# EAGLE board untitled (EAGLE 6.4)
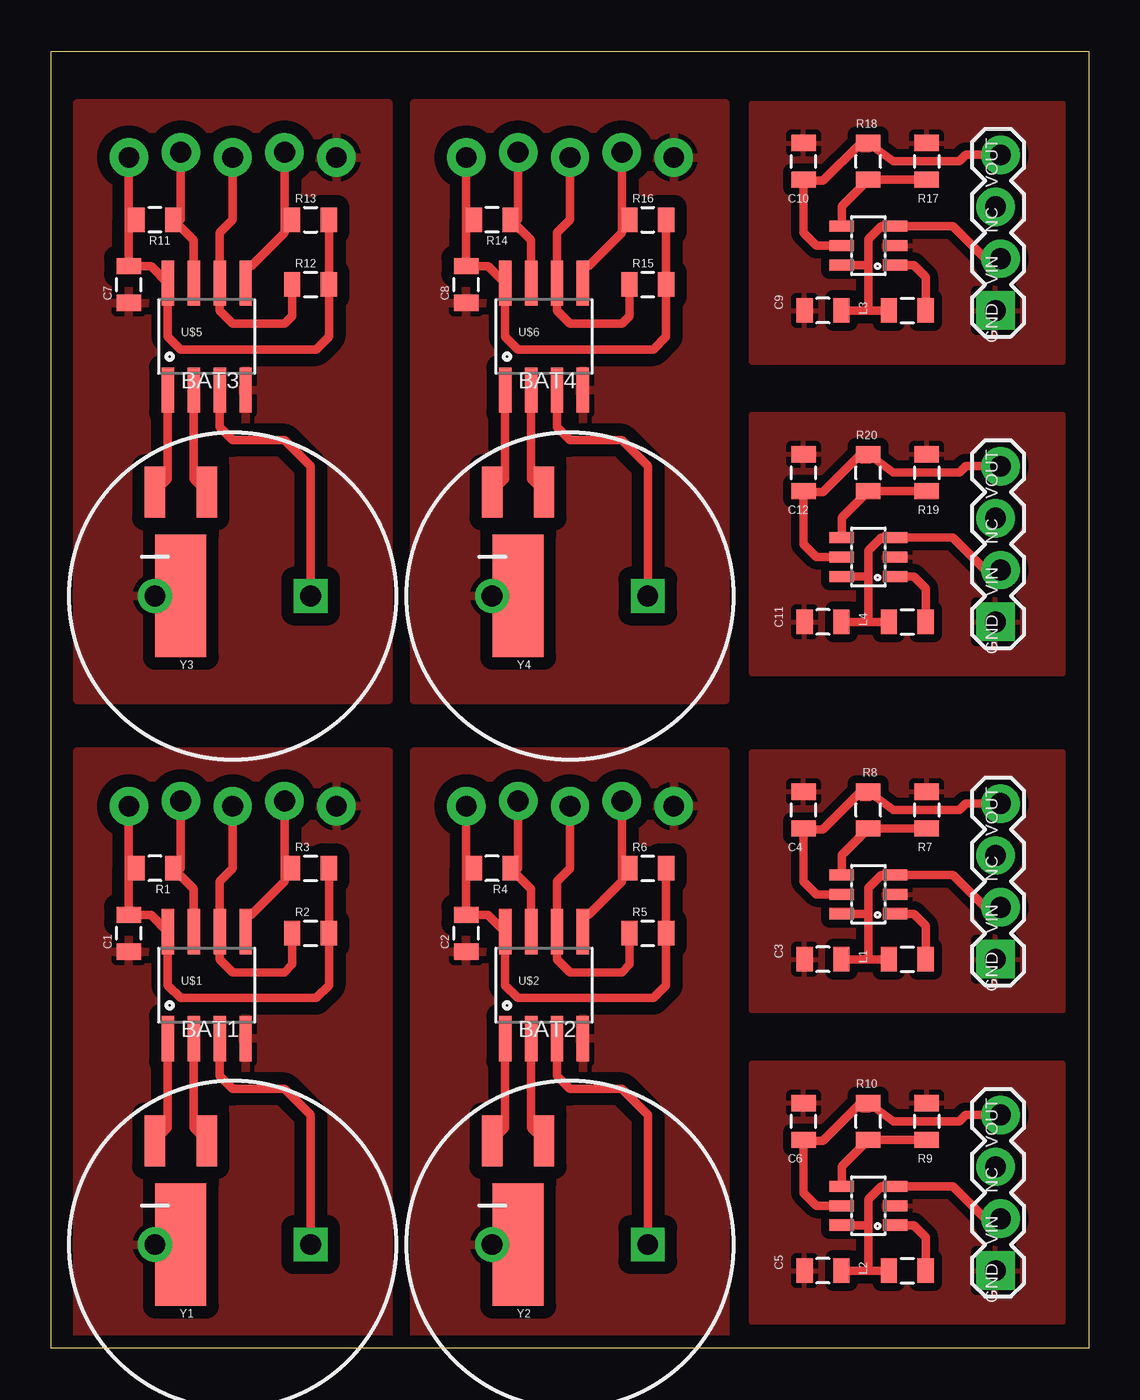
[diagram p0: board, top side]
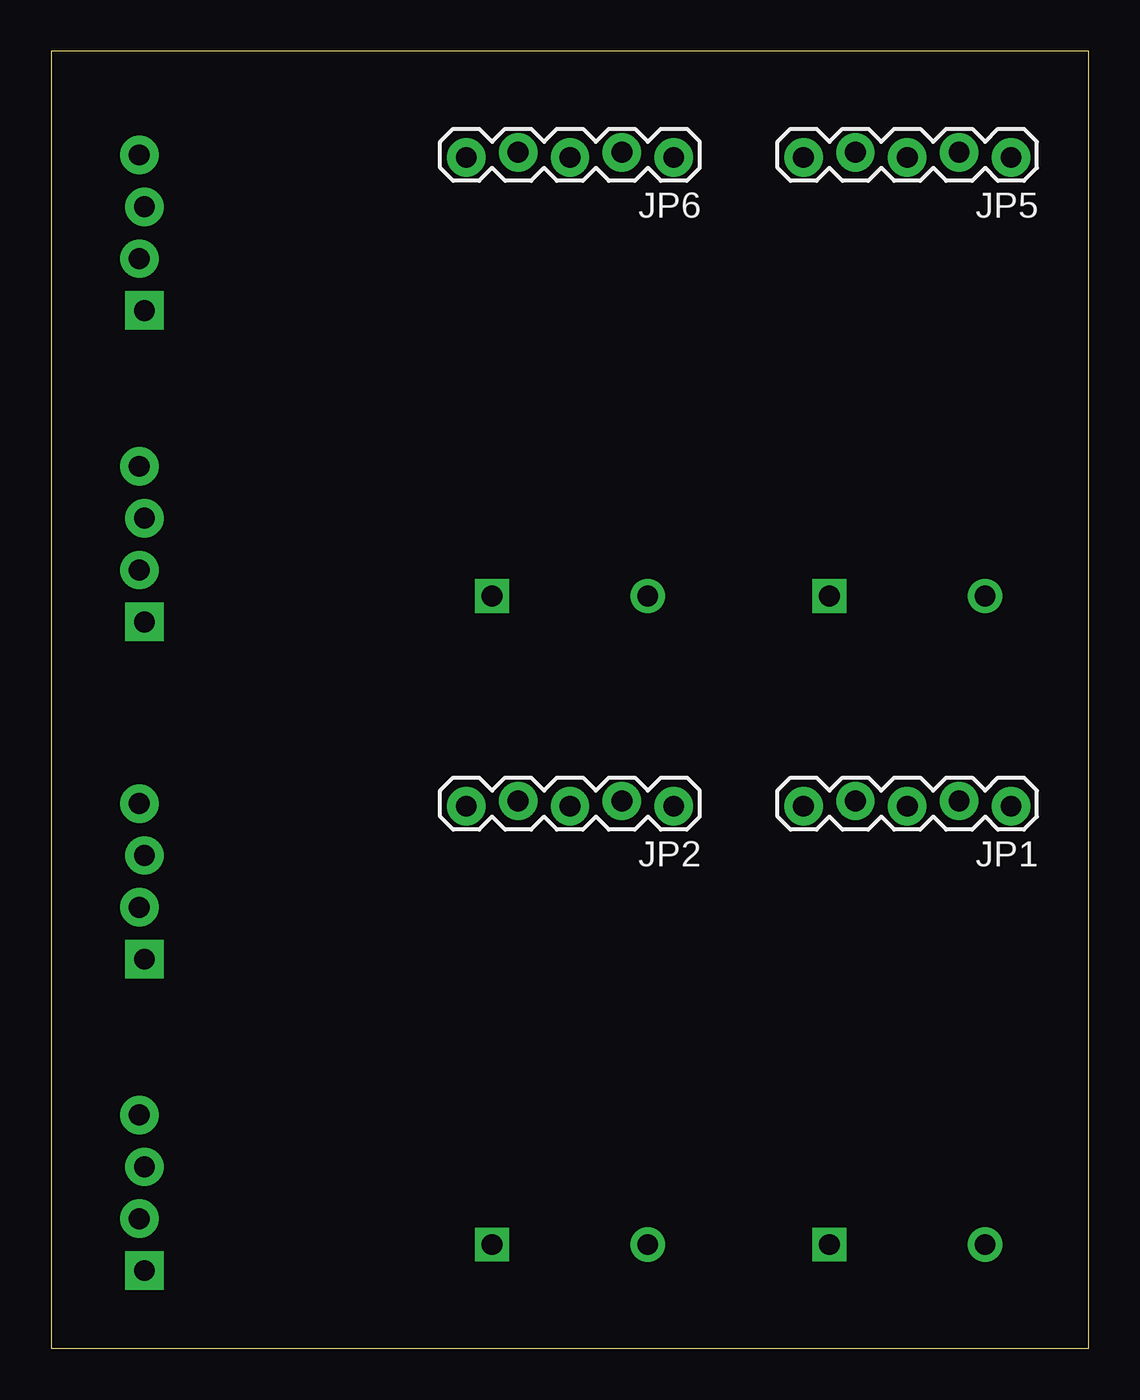
[diagram p1: board, bottom side, seen from below]

Size 50.8 x 63.5 mm. Coordinates in mm from the lower left corner, seen from the top.
Outline: 0,0 0,63.5 50.8,63.5 50.8,0 0,0
Copper layers (1*16): Top 0.035mm / dielectric 1.5mm / Bottom 0.035mm
Design rules "default *": minimum track width 10mil, minimum drill 24mil, track to track 8mil, track to pad 8mil, pad to pad 8mil, via to via 8mil, smd to smd 8mil, copper to edge 10mil, drill to drill 8mil, minimum pad ring 10mil, minimum via ring 8mil, stop-mask expansion 4mil, vias tented up to drill 0mil, thermal gap 10mil

## Footprints (pad centres in the part's own frame; a part is rotated, then mirrored left to right if it is on the bottom)
CPOL-RADIAL-1000UF-63V = drill 1.016 pad 1.651 square: 1 3.81,0 | drill 1.016 pad 1.676: 2 -3.81,0
0805 = smd 0.8 x 1.2: 1 -0.9,0; 2 0.9,0
1X05_LOCK = drill 1.016 pad 1.88: 1 0,0.127; 2 2.54,-0.127; 3 5.08,0.127; 4 7.62,-0.127; 5 10.16,0.127
1X04_LOCK = drill 1.016 pad 1.88 square: 1 0,0.127 | drill 1.016 pad 1.88: 2 2.54,-0.127; 3 5.08,0.127; 4 7.62,-0.127
SO08 = smd 0.61 x 2.21: 1 -1.905,-2.616; 2 -0.635,-2.616; 3 0.635,-2.616; 4 1.905,-2.616; 5 1.905,2.616; 6 0.635,2.616; 7 -0.635,2.616; 8 -1.905,2.616
SOT23-6L = smd 0.55 x 1.2: 1 -0.95,-1.3; 2 0,-1.3; 3 0.95,-1.3; 4 0.95,1.3; 5 0,1.3; 6 -0.95,1.3
CRYSTAL-32KHZ-SMD = smd 2.5 x 6: SHEILD 0,5.08 | smd 1 x 2.5: X1 -1.27,0; X2 1.27,0

## Placement (x,y rotation side)
BAT1  [CPOL-RADIAL-1000UF-63V]  8.89,5.08 0 top
BAT2  [CPOL-RADIAL-1000UF-63V]  25.4,5.08 0 top
BAT3  [CPOL-RADIAL-1000UF-63V]  8.89,36.83 0 top
BAT4  [CPOL-RADIAL-1000UF-63V]  25.4,36.83 0 top
C1  [0805]  3.81,20.32 90 top
C2  [0805]  20.32,20.32 90 top
C3  [0805]  37.78,19.05 180 top
C4  [0805]  36.83,26.35 90 top
C5  [0805]  37.78,3.81 180 top
C6  [0805]  36.83,11.11 90 top
C7  [0805]  3.81,52.07 90 top
C8  [0805]  20.32,52.07 90 top
C9  [0805]  37.78,50.8 180 top
C10  [0805]  36.83,58.1 90 top
C11  [0805]  37.78,35.56 180 top
C12  [0805]  36.83,42.86 90 top
JP1  [1X05_LOCK]  3.81,26.67 180 bottom
JP2  [1X05_LOCK]  20.32,26.67 180 bottom
JP3  [1X04_LOCK]  46.35,19.05 90 top
JP4  [1X04_LOCK]  46.35,3.81 90 top
JP5  [1X05_LOCK]  3.81,58.42 180 bottom
JP6  [1X05_LOCK]  20.32,58.42 180 bottom
JP7  [1X04_LOCK]  46.35,50.8 90 top
JP8  [1X04_LOCK]  46.35,35.56 90 top
L1  [0805]  41.91,19.05 0 top
L2  [0805]  41.91,3.81 0 top
L3  [0805]  41.91,50.8 0 top
L4  [0805]  41.91,35.56 0 top
R1  [0805]  5.08,23.5 180 top
R2  [0805]  12.7,20.32 0 top
R3  [0805]  12.7,23.5 0 top
R4  [0805]  21.59,23.5 180 top
R5  [0805]  29.21,20.32 0 top
R6  [0805]  29.21,23.5 0 top
R7  [0805]  42.86,26.35 270 top
R8  [0805]  40.01,26.35 90 top
R9  [0805]  42.86,11.11 270 top
R10  [0805]  40.01,11.11 90 top
R11  [0805]  5.08,55.24 180 top
R12  [0805]  12.7,52.07 0 top
R13  [0805]  12.7,55.24 0 top
R14  [0805]  21.59,55.24 180 top
R15  [0805]  29.21,52.07 0 top
R16  [0805]  29.21,55.24 0 top
R17  [0805]  42.86,58.1 270 top
R18  [0805]  40.01,58.1 90 top
R19  [0805]  42.86,42.86 270 top
R20  [0805]  40.01,42.86 90 top
U$1  BQ32000  [SO08]  7.62,17.78 0 top
U$2  BQ32000  [SO08]  24.13,17.78 0 top
U$3  TLV61220  [SOT23-6L]  40.01,22.23 90 top
U$4  TLV61220  [SOT23-6L]  40.01,6.99 90 top
U$5  BQ32000  [SO08]  7.62,49.53 0 top
U$6  BQ32000  [SO08]  24.13,49.53 0 top
U$7  TLV61220  [SOT23-6L]  40.01,53.98 90 top
U$8  TLV61220  [SOT23-6L]  40.01,38.73 90 top
Y1  [CRYSTAL-32KHZ-SMD]  6.35,10.16 180 top
Y2  [CRYSTAL-32KHZ-SMD]  22.86,10.16 180 top
Y3  [CRYSTAL-32KHZ-SMD]  6.35,41.91 180 top
Y4  [CRYSTAL-32KHZ-SMD]  22.86,41.91 180 top

## Library data of the parts
BAT1-BAT4 = SparkFun-Capacitors
C1-C12 L1-L4 R1-R20 = SparkFun-Passives
JP1-JP8 = SparkFun-Connectors
U$1-U$8 = custom
Y1-Y4 = SparkFun-FreqCtrl

## Nets
GND: BAT1.2 C1.1 JP1.5 U$1.4
GND1: BAT2.2 C2.1 JP2.5 U$2.4
GND2: C3.2 C4.2 JP3.1 R7.1 U$3.2
GND3: C5.2 C6.2 JP4.1 R9.1 U$4.2
GND4: BAT3.2 C7.1 JP5.5 U$5.4
GND5: BAT4.2 C8.1 JP6.5 U$6.4
GND6: C9.2 C10.2 JP7.1 R17.1 U$7.2
GND7: C11.2 C12.2 JP8.1 R19.1 U$8.2
N$1: BAT1.1 U$1.3
N$2: JP1.2 R1.1 U$1.7
N$3: JP1.3 R2.1 U$1.6
N$4: JP1.4 R3.1 U$1.5
N$5: U$1.1 Y1.X2
N$6: U$1.2 Y1.X1
N$7: JP2.2 R4.1 U$2.7
N$8: JP2.3 R5.1 U$2.6
N$9: JP2.4 R6.1 U$2.5
N$10: U$2.1 Y2.X2
N$11: U$2.2 Y2.X1
N$12: BAT2.1 U$2.3
N$13: L1.2 U$3.1
N$14: R7.2 R8.1 U$3.4
N$15: C4.1 JP3.4 R8.2 U$3.5
N$16: L2.2 U$4.1
N$17: R9.2 R10.1 U$4.4
N$18: C6.1 JP4.4 R10.2 U$4.5
N$19: JP5.2 R11.1 U$5.7
N$20: JP5.3 R12.1 U$5.6
N$21: JP5.4 R13.1 U$5.5
N$22: U$5.1 Y3.X2
N$23: U$5.2 Y3.X1
N$24: BAT3.1 U$5.3
N$25: JP6.2 R14.1 U$6.7
N$26: JP6.3 R15.1 U$6.6
N$27: JP6.4 R16.1 U$6.5
N$28: U$6.1 Y4.X2
N$29: U$6.2 Y4.X1
N$30: BAT4.1 U$6.3
N$31: L3.2 U$7.1
N$32: R17.2 R18.1 U$7.4
N$33: C10.1 JP7.4 R18.2 U$7.5
N$34: L4.2 U$8.1
N$35: R19.2 R20.1 U$8.4
N$36: C12.1 JP8.4 R20.2 U$8.5
VCC: C1.2 JP1.1 R1.2 R2.2 R3.2 U$1.8
VCC1: C2.2 JP2.1 R4.2 R5.2 R6.2 U$2.8
VCC2: C7.2 JP5.1 R11.2 R12.2 R13.2 U$5.8
VCC3: C8.2 JP6.1 R14.2 R15.2 R16.2 U$6.8
VIN: C3.1 JP3.2 L1.1 U$3.3 U$3.6
VIN1: C5.1 JP4.2 L2.1 U$4.3 U$4.6
VIN2: C9.1 JP7.2 L3.1 U$7.3 U$7.6
VIN3: C11.1 JP8.2 L4.1 U$8.3 U$8.6

## Tracks (layer width: path | path; a pad name or v marks a point on that pad's centre or on a via)
GND
  pour Top (isolate 0.61): 1.27,0 1.27,29.21 16.51,29.21 16.51,0
GND1
  pour Top (isolate 0.61): 17.78,0 17.78,29.21 33.02,29.21 33.02,0
GND2
  pour Top (isolate 0.406): 34.29,29.21 49.53,29.21 49.53,16.51 34.29,16.51
GND3
  pour Top (isolate 0.406): 34.29,13.97 49.53,13.97 49.53,1.27 34.29,1.27
GND4
  pour Top (isolate 0.61): 1.27,31.75 1.27,60.96 16.51,60.96 16.51,31.75
GND5
  pour Top (isolate 0.61): 17.78,31.75 17.78,60.96 33.02,60.96 33.02,31.75
GND6
  pour Top (isolate 0.406): 34.29,60.96 49.53,60.96 49.53,48.26 34.29,48.26
GND7
  pour Top (isolate 0.406): 34.29,45.72 49.53,45.72 49.53,33.02 34.29,33.02
N$1
  Top 0.406: U$1.3 8.26,13.34 8.89,12.7 11.43,12.7 12.7,11.43 BAT1.1
N$2
  Top 0.406: JP1.2 6.35,23.5 R1.1 6.99,22.49 U$1.7
N$3
  Top 0.406: R2.1 11.8,18.79 11.43,18.41 8.89,18.41 8.26,19.05 U$1.6 8.26,22.86 8.89,23.5 JP1.3
N$4
  Top 0.406: U$1.5 9.53,21.22 9.79,21.22 11.43,22.86 11.43,23.5 | JP1.4 11.43,23.5 | R3.1 11.43,23.5
N$5
  Top 0.406: Y1.X2 5.71,10.79 U$1.1
N$6
  Top 0.406: Y1.X1 6.99,10.79 U$1.2
N$7
  Top 0.406: JP2.2 22.86,23.5 R4.1 23.5,22.49 U$2.7
N$8
  Top 0.406: R5.1 28.31,18.79 27.94,18.41 25.4,18.41 24.77,19.05 U$2.6 24.77,22.86 25.4,23.5 JP2.3
N$9
  Top 0.406: U$2.5 26.04,21.22 26.3,21.22 27.94,22.86 27.94,23.5 | JP2.4 27.94,23.5 | R6.1 27.94,23.5
N$10
  Top 0.406: Y2.X2 22.23,10.79 U$2.1
N$11
  Top 0.406: Y2.X1 23.5,10.79 U$2.2
N$12
  Top 0.406: U$2.3 24.77,13.34 25.4,12.7 27.94,12.7 29.21,11.43 BAT2.1
N$13
  Top 0.406: U$3.1 42.23,21.27 42.81,20.69 L1.2
N$14
  Top 0.406: R7.2 R8.1 38.7,24.15 U$3.4
N$15
  Top 0.406: U$3.5 37.47,22.23 36.83,22.86 C4.1 36.88,25.4 37.78,25.4 39.63,27.25 R8.2 | 39.69,26.99 40.06,26.99 R8.2 | R8.2 41.22,26.35 44.45,26.35 44.77,26.67 JP3.4
N$16
  Top 0.406: U$4.1 42.23,6.04 42.81,5.45 L2.2
N$17
  Top 0.406: R9.2 R10.1 38.7,8.91 U$4.4
N$18
  Top 0.406: U$4.5 37.47,6.99 36.83,7.62 C6.1 36.88,10.16 37.78,10.16 39.63,12.01 R10.2 | 39.69,11.75 40.06,11.75 R10.2 | R10.2 41.22,11.11 44.45,11.11 44.77,11.43 JP4.4
N$19
  Top 0.406: JP5.2 6.35,55.24 R11.1 6.99,54.24 U$5.7
N$20
  Top 0.406: R12.1 11.8,50.53 11.43,50.16 8.89,50.16 8.26,50.8 U$5.6 8.26,54.61 8.89,55.24 JP5.3
N$21
  Top 0.406: U$5.5 9.53,52.97 9.79,52.97 11.43,54.61 11.43,55.24 | JP5.4 11.43,55.24 | R13.1 11.43,55.24
N$22
  Top 0.406: Y3.X2 5.71,42.55 U$5.1
N$23
  Top 0.406: Y3.X1 6.99,42.55 U$5.2
N$24
  Top 0.406: U$5.3 8.26,45.09 8.89,44.45 11.43,44.45 12.7,43.18 BAT3.1
N$25
  Top 0.406: JP6.2 22.86,55.24 R14.1 23.5,54.24 U$6.7
N$26
  Top 0.406: R15.1 28.31,50.53 27.94,50.16 25.4,50.16 24.77,50.8 U$6.6 24.77,54.61 25.4,55.24 JP6.3
N$27
  Top 0.406: U$6.5 26.04,52.97 26.3,52.97 27.94,54.61 27.94,55.24 | JP6.4 27.94,55.24 | R16.1 27.94,55.24
N$28
  Top 0.406: Y4.X2 22.23,42.55 U$6.1
N$29
  Top 0.406: Y4.X1 23.5,42.55 U$6.2
N$30
  Top 0.406: U$6.3 24.77,45.09 25.4,44.45 27.94,44.45 29.21,43.18 BAT4.1
N$31
  Top 0.406: U$7.1 42.23,53.02 42.81,52.44 L3.2
N$32
  Top 0.406: R17.2 R18.1 38.7,55.9 U$7.4
N$33
  Top 0.406: U$7.5 37.47,53.98 36.83,54.61 C10.1 36.88,57.15 37.78,57.15 39.63,59 R18.2 | 39.69,58.74 40.06,58.74 R18.2 | R18.2 41.22,58.1 44.45,58.1 44.77,58.42 JP7.4
N$34
  Top 0.406: U$8.1 42.23,37.78 42.81,37.2 L4.2
N$35
  Top 0.406: R19.2 R20.1 38.7,40.66 U$8.4
N$36
  Top 0.406: U$8.5 37.47,38.73 36.83,39.37 C12.1 36.88,41.91 37.78,41.91 39.63,43.76 R20.2 | 39.69,43.5 40.06,43.5 R20.2 | R20.2 41.22,42.86 44.45,42.86 44.77,43.18 JP8.4
VCC
  Top 0.406: JP1.1 3.81,23.5 | R1.2 3.81,23.5 | R3.2 R2.2 13.6,17.78 12.96,17.14 6.35,17.14 5.71,17.78 U$1.8 4.89,21.22 C1.2 3.81,23.5
VCC1
  Top 0.406: JP2.1 20.32,23.5 | R4.2 20.32,23.5 | R6.2 R5.2 30.11,17.78 29.48,17.14 22.86,17.14 22.23,17.78 U$2.8 21.4,21.22 C2.2 20.32,23.5
VCC2
  Top 0.406: JP5.1 3.81,55.24 | R11.2 3.81,55.24 | R13.2 R12.2 13.6,49.53 12.96,48.9 6.35,48.9 5.71,49.53 U$5.8 4.89,52.97 C7.2 3.81,55.24
VCC3
  Top 0.406: JP6.1 20.32,55.24 | R14.2 20.32,55.24 | R16.2 R15.2 30.11,49.53 29.48,48.9 22.86,48.9 22.23,49.53 U$6.8 21.4,52.97 C8.2 20.32,55.24
VIN
  Top 0.406: 40.01,21.27 40.01,22.54 40.64,23.18 arc0 U$3.3 44.13,23.18 45.72,21.59 JP3.2 | 40.01,21.27 40.01,19.05 | U$3.6 40.01,21.27 | C3.1 40.01,19.05 | L1.1 40.01,19.05
VIN1
  Top 0.406: 40.01,6.04 40.01,7.3 40.64,7.94 arc0 U$4.3 44.13,7.93 45.72,6.35 JP4.2 | 40.01,6.04 40.01,3.81 | U$4.6 40.01,6.04 | C5.1 40.01,3.81 | L2.1 40.01,3.81
VIN2
  Top 0.406: 40.01,53.02 40.01,54.29 40.64,54.93 arc0 U$7.3 44.13,54.92 45.72,53.34 JP7.2 | 40.01,53.02 40.01,50.8 | U$7.6 40.01,53.02 | C9.1 40.01,50.8 | L3.1 40.01,50.8
VIN3
  Top 0.406: 40.01,37.78 40.01,39.05 40.64,39.69 arc0 U$8.3 44.13,39.69 45.72,38.1 JP8.2 | 40.01,37.78 40.01,35.56 | U$8.6 40.01,37.78 | C11.1 40.01,35.56 | L4.1 40.01,35.56

## Text on the board
tPlace: VOUT | NC | VIN | GND | VOUT | NC | VIN | GND | VOUT | NC | VIN | GND | VOUT | NC | VIN | GND